# Altium PCB PCB_proj_module_1_1.PcbDoc (part 5 of 9)
Units mm, origin at the board's own origin, x right, y up, seen from the top; angles counter-clockwise.
Board outline 413 x 280 mm, 4 copper layers (Top Layer, Signal Layer 1, Signal Layer 2, Bottom Layer), stack 0.778 mm thick; 1054 components, 639 nets, 3181 pads, 673 vias.
Unrouted connection lines stored in the file: 570.
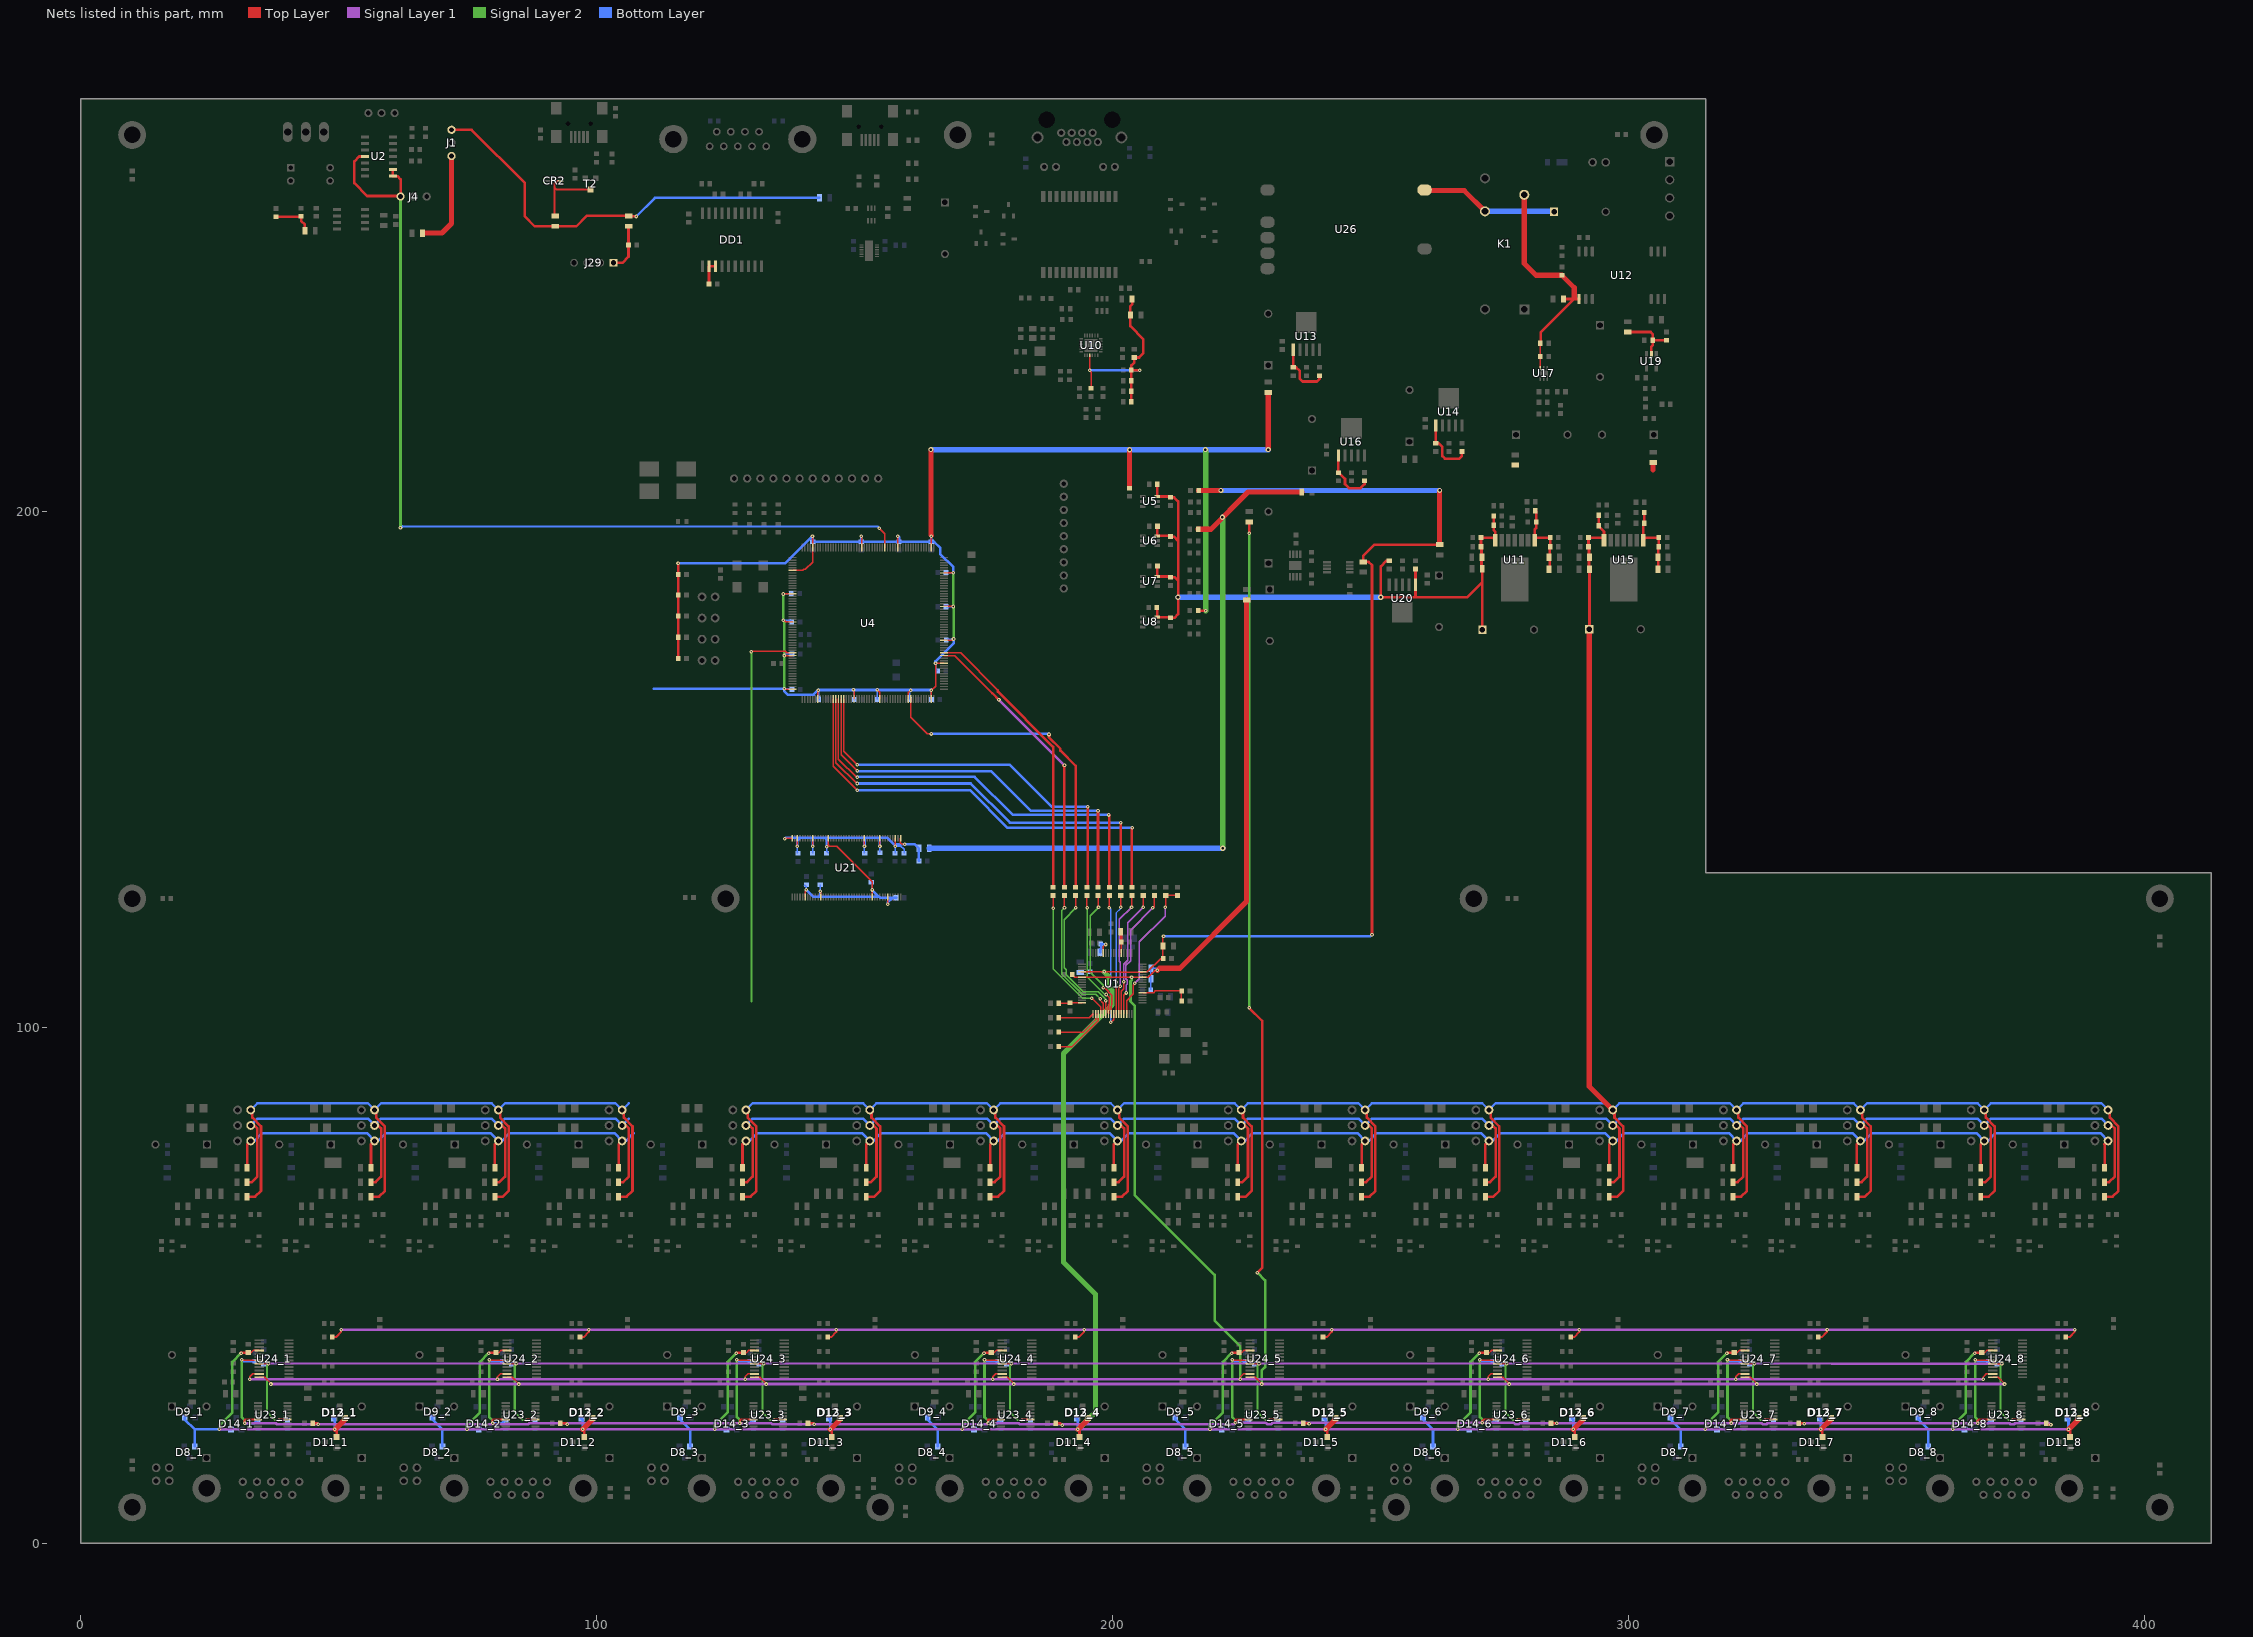
[diagram p6: the nets of this part, all layers, seen from the top]

## Via types
v1: diameter 0.7, hole 0.3, Top Layer to Bottom Layer, tented both sides, 659 vias
v2: diameter 1, hole 0.5, Top Layer to Bottom Layer, tented both sides, 12 vias
v3: diameter 0.66, hole 0.33, Top Layer to Bottom Layer, 2 vias

## Nets (pads, with @x,y where several pads share a name; then routed paths per layer and width w, separated by ;. In a path a pad name is that pad's centre, name@x,y a point inside that pad or via, vN(x,y) a via of type N, cw(c..) or ccw(c..) an arc to the next point about the centre after c; other vN are vias at no path point) (continued)
"3V3 Digital MCU": C27.2 C28.2 C29.2 C30.2 C31.2 C32.2 C33.2 C34.2 C37.2 C38.2 C39.2 C40.2 C41.2 C42.2 C43.2 C44.2 C48.2 J1.1 L7.2 L17.2 L18.2 L?.2 R29.2 R30.2 R41.2 R44.2 R47.2 R49.2 R50.2 U4.6 U4.15 U4.26 U4.39 U4.52 U4.59 U4.73 U4.83 U4.94 U4.103 U4.115 U4.124 U4.137 U4.150 U4.158 U4.171 U4.185 U4.204 | length 459.4
  Top Layer w0.254: v1@136.3,184.106 U4.15@137.986,184.106 ; v1(136.35,165.625) 136.369,165.606 U4.52@137.986,165.606 ; v1(136.4,172.1) v1@136.397,172.1 ; v1@136.475,178.85 136.719,178.606 U4.26@137.986,178.606 ; U4.39@137.986,172.106 137.98,172.1 U4.39@137.975,172.1 v1@136.397,172.1 ; U4.6@137.986,188.606 139.949,188.606 140.12,188.777 140.477,188.777 141.911,190.211 v1@141.911,195.164 ; U4.59@142.9,163.675 142.9,165.3 v1(142.95,165.35) ; v1(149.8,165.45) 149.822,165.45 149.911,165.361 U4.73@149.911,163.681 ; U4.185@151.411,193.031 v1@151.411,195.062 ; v1(154.418,165.454) 154.407,165.454 154.911,164.95 U4.83@154.911,163.681 ; U4.171@158.411,193.031 v1@158.411,195.174 ; U4.94@160.411,163.681 160.411,164.892 160.875,165.356 v1(160.875,165.375) ; U4.103@164.911,163.681 v1(164.911,165.375) 165.706,166.17 v1(165.706,170.602) 167.332,170.602 U4.115@167.336,170.606 ; U4.158@164.911,193.031 v1@164.911,195.024 ; U4.124@167.336,175.106 v1@169.175,175.106 ; U4.137@167.336,181.606 v1@169.175,181.606 ; U4.150@167.336,188.106 v1@169.175,188.106 ; v1@136.397,172.1 136.322,172.175 136.247,172.1 v1@136.397,172.1
  Top Layer w0.5: J1.1@71.9,273.991 75.809,273.991 86.1,263.7 86.1,257.2 88,255.3 L18.2@92,255.3 96.1,255.3 98.1,257.3 L17.2@106.2,257.3 106.3,257.2 v1(107.7,257.2) ; v1(115.8,189.95) 115.85,189.9 R29.2@115.85,187.775 R41.2@115.85,183.84 R44.2@115.85,179.736 R47.2@115.85,175.631 R50.2@115.85,171.526 ; R49.2@216.612,180.822 216.646,180.788 v1(218.086,180.788)
  Top Layer w1: v2(164.8,212) 164.8,195.487 v1@164.956,195.331 ; R30.2@203.311,204.7 v2(203.311,211.989) ; v2(230.2,212) L7.2@230.2,223.1
  Signal Layer 2 w0.254: v1(169.15,181.6) v1@169.175,181.575
  Signal Layer 2 w0.5: v1(136.2,184.025) v1(136.2,178.925) 136.4,178.725 v1(136.4,172.1) 136.4,165.675 v1(136.35,165.625) ; v1(169.15,181.6) v1(169.15,188.125) ; v1@169.175,181.575 169.2,181.55 v1(169.2,175.3)
  Signal Layer 2 w1: v2(218,212) 218.086,211.914 v1(218.086,180.788)
  Bottom Layer w0.254: v1(136.2,178.925) 137.525,178.925 C33.2@137.85,178.6 ; v1(136.2,184.025) 137.675,184.025 C34.2@137.775,184.125 ; v1(136.35,165.625) 137.775,165.625 C31.2@137.875,165.525 ; v1(136.4,172.1) 136.4,172.225 136.575,172.4 C32.2@137.9,172.4 ; v1@149.95,165.415 149.95,163.65 C29.2@150.075,163.525 ; v1(154.418,165.454) 154.418,165.415 154.418,163.632 C28.2@154.45,163.6 ; C27.2@160.7,163.6 160.7,165.2 v1(160.875,165.375) ; v1(164.911,165.375) 164.911,163.614 C44.2@164.925,163.6 ; v1(165.706,170.602) 165.706,169.494 C43.2@166.075,169.125 ; C42.2@167.739,174.952 168.087,175.3 v1(169.2,175.3) ; C48.2@167.739,181.556 167.783,181.6 v1(169.15,181.6) ; C41.2@167.739,188.16 167.774,188.125 v1(169.15,188.125)
  Bottom Layer w0.5: v1(107.7,257.2) 111.3,260.8 L?.2@143.2,260.8 ; 111.1,165.625 v1(136.35,165.625) 136.35,165.2 137.025,164.525 142.059,164.525 v1@142.917,165.383 ; v1(115.8,189.95) 136.55,189.95 v1(141.85,195.25) 141.9,195.2 C37.2@141.9,194.15 C38.2@151.3,194.15 ; v1(142.95,165.35) 142.95,163.75 C30.2@143.075,163.625 ; v1@143.027,165.415 v1@149.8,165.415 ; v1@149.95,165.415 154.418,165.415 164.871,165.415 v1(164.911,165.375) ; v1(151.3,195.2) C38.2@151.3,194.15 ; v1(158.4,195.225) 158.625,195 C39.2@158.625,194.15 ; v1(164.85,195.225) 164.875,195.2 C40.2@164.875,194.15 ; v1(165.706,170.602) 165.706,170.981 169.2,174.475 v1(169.2,175.3) ; v1(169.15,188.125) 169.15,189.225 166.65,191.725 166.65,192.95 165.45,194.15 C40.2@164.875,194.15 ; v1@217.936,180.788 v1(218.086,180.788) ; C38.2@151.3,194.15 C39.2@158.625,194.15 ; C39.2@158.625,194.15 C40.2@164.875,194.15
  Bottom Layer w1: v2(164.8,212) 164.811,211.989 v2(203.311,211.989) 230.189,211.989 v2(230.2,212)
"3V3 Digital SDRAM": L10.2 L16.1 R40.2 | length 144.1
  Top Layer w1: R40.2@216.612,196.57 219.07,196.57 226.294,203.794 L10.2@236.693,203.794
  Signal Layer 2 w1: v2(221.3,198.9) 221.366,198.834 v2(221.366,134.734)
  Bottom Layer w1: L16.1@164.49,134.734 v2(221.366,134.734)
"3V3 Ethernet": C76.2 L4.1 L5.1 R57.2 R58.2 R59.2 R69.2 R70.1 U10.9 | length 40.3
  Top Layer w0.254: v1@195.619,227.424 U10.9@195.619,230.324 ; v1@195.624,227.323 195.905,227.041 C76.2@195.905,224.036
  Top Layer w0.508: R59.2@203.657,221.3 R58.2@203.657,223.332 R57.2@203.657,225.364 R69.2@203.657,227.424 ; L4.1@203.75,241.15 L4.1@203.8,241.2 203.8,240.162 203.45,239.812 203.45,235.95 206,233.4 206,230.7 205.172,229.872 R70.1@204.223,229.872 204.223,228.923 203.657,228.357 R69.2@203.657,227.424 ; v1(205.263,227.424) R69.2@203.657,227.424
  Bottom Layer w0.508: v1(195.611,227.424) v1(205.263,227.424)
"3V3 SDRAM": C133.2 C134.2 C135.2 C136.2 C137.2 C138.2 C139.2 C140.2 C141.2 C142.2 C143.2 C144.1 L16.2 U21.1 U21.3 U21.9 U21.15 U21.29 U21.35 U21.41 U21.43 U21.49 U21.55 U21.75 U21.81 | length 107.2
  Top Layer w0.254: v1(136.514,136.609) 136.582,136.677 137.768,136.677 U21.43@137.866,136.579 ; v1(138.934,135.144) U21.41@138.934,136.678 ; U21.49@140.434,125.278 140.434,126.439 v1(140.678,126.683) ; v1(141.934,135.146) U21.35@141.934,136.678 ; v1(143.378,126.433) 143.434,126.377 U21.55@143.434,125.278 ; U21.29@144.934,136.678 144.934,135.352 145.186,135.1 146.6,135.1 153.434,128.266 v1(153.434,126.66) U21.75@153.434,125.278 ; v1(151.934,135.098) U21.15@151.934,136.678 ; v1(154.934,135.146) U21.9@154.934,136.678 ; v1(156.434,123.866) U21.81@156.434,125.278 ; v1(157.934,135.144) U21.3@157.934,136.678 ; U21.1@158.934,136.678 158.911,136.655 158.911,135.851 159.254,135.508 159.704,135.508 v1(159.754,135.558)
  Top Layer w0.5: v1(144.624,135.042) 144.934,135.352
  Bottom Layer w0.254: v1(136.514,136.609) v1@136.657,136.752 ; v1(138.934,135.144) 138.934,133.874 C139.2@139.036,133.772 ; C141.2@140.306,127.638 140.678,127.266 v1(140.678,126.683) ; 141.718,136.752 141.934,136.536 ; C138.2@141.83,133.81 141.934,133.914 v1(141.934,135.146) ; C142.2@143.354,127.638 143.378,127.614 v1(143.378,126.433) ; v1(144.624,135.042) 144.624,134.176 144.934,133.866 C137.2@144.878,133.81 ; 151.878,136.752 151.934,136.696 ; v1(151.934,135.098) 151.934,133.866 C136.2@151.99,133.81 ; C143.2@153.26,128.4 153.434,128.226 v1(153.434,126.66) ; 154.772,125.322 154.958,125.136 ; 154.926,136.752 154.934,136.744 ; C135.2@154.929,133.949 154.929,135.141 v1(154.934,135.146) ; v1(156.434,123.866) 156.434,124.246 ; C134.2@157.832,133.81 157.934,133.912 v1(157.934,135.144) 158.868,135.144 158.784,135.228 158.916,135.228 159.61,134.534 C133.2@159.61,133.81
  Bottom Layer w0.5: v1@136.657,136.752 136.846,136.752 136.894,136.8 137.556,136.8 137.604,136.752 139.432,136.752 ; v1(138.934,135.144) 138.934,136.254 139.432,136.752 ; v1(140.678,126.683) 142.039,125.322 142.988,125.322 ; v1(141.934,135.146) 141.934,136.536 ; v1(143.378,126.433) 143.378,125.712 142.988,125.322 ; v1(144.624,135.042) 144.624,136.386 144.258,136.752 ; v1(151.934,135.098) 151.934,136.696 ; v1(153.434,126.66) 154.772,125.322 142.988,125.322 ; v1(154.934,135.146) 154.934,136.744 ; 154.958,125.136 157.324,125.136 ; 156.434,124.246 157.324,125.136 ; C144.1@158.048,125.136 157.324,125.136 ; C140.2@162.5,132.3 162.49,132.31 L16.2@162.49,134.734 161.666,135.558 v1(159.754,135.558) 157.667,135.558 157.617,135.508 156.373,136.752 154.926,136.752 151.878,136.752 144.258,136.752 ; 139.432,136.752 141.718,136.752 144.258,136.752
"3V3 ST-link": C145.2 J29.1 L17.1 | length 9.3
  Top Layer w0.508: J29.1@103.277,248.211 105.011,248.211 106.2,249.4 C145.2@106.2,251.7 L17.1@106.2,255.3
"3V3 USB protection": CR2.5 L18.1 T2.3 | length 14.8
  Top Layer w0.381: L18.1@92,257.3 91.9,257.4 91.9,262.8 ; CR2.5@93.013,264.1 92.393,264.1 91.9,263.607 91.9,262.8 ; T2.3@98.833,262.414 92.286,262.414 91.9,262.8
3V9: L22.2 U24_1.12 U24_2.12 U24_3.12 U24_4.12 U24_5.12 U24_6.12 U24_7.12 U24_8.12 | length 528.4
  Top Layer w0.3: U24_1.12@34.63,32.225 35.675,32.225 36.9,31 v1(36.9,30.9) ; U24_2.12@82.63,32.225 83.675,32.225 84.9,31 v1(84.9,30.9) ; U24_3.12@130.63,32.225 131.675,32.225 132.9,31 v1(132.9,30.9) ; U24_4.12@178.63,32.225 179.675,32.225 180.9,31 v1(180.9,30.9) ; U24_5.12@226.63,32.225 227.675,32.225 228.9,31 v1(228.9,30.9) ; U24_6.12@274.63,32.225 275.675,32.225 276.9,31 v1(276.9,30.9) ; U24_7.12@322.63,32.225 323.675,32.225 324.9,31 v1(324.9,30.9) ; U24_8.12@370.63,32.225 371.675,32.225 372.9,31 v1(372.9,30.9)
  Top Layer w0.5: v1(226.5,103.814) 229,101.314 229,53.4 v1(228.1,52.5) ; v1(226.5,195.8) L22.2@226.5,198
  Signal Layer 1 w0.5: v1(36.9,30.9) v1(84.9,30.9) v1(132.9,30.9) v1(180.9,30.9) v1(228.9,30.9) v1(276.9,30.9) v1(324.9,30.9) v1(372.9,30.9)
  Signal Layer 2 w0.5: v1(226.5,103.814) v1(226.5,195.8) ; v1(228.1,52.5) 229.6,51 229.6,34.2 228.9,33.5 v1(228.9,30.9)
3V_pwr: C107.1 C110.2 C111.2 C112.2 C113.2 J24_1.1 J24_2.1 J24_3.1 J24_4.1 J24_5.1 J24_6.1 J24_7.1 J24_8.1 J24_9.1 J24_10.1 J24_11.1 J24_12.1 J24_13.1 J24_14.1 J24_15.1 J24_16.1 L21_1.2 L21_2.2 L21_3.2 L21_4.2 L21_5.2 L21_6.2 L21_7.2 L21_8.2 L21_9.2 L21_10.2 L21_11.2 L21_12.2 L21_13.2 L21_14.2 L21_15.2 L21_16.2 R95.1 TP17.1 U15.7 | length 789.8
  Top Layer w0.5: L21_1.2@32.288,67.226 33.842,67.226 34.97,68.354 34.97,80.858 33.3,82.528 33.3,83.501 33.394,83.596 J24_1.1@32.97,84.02 ; L21_2.2@56.288,67.226 57.842,67.226 58.97,68.354 58.97,80.858 57.3,82.528 57.3,83.501 57.394,83.596 J24_2.1@56.97,84.02 ; L21_3.2@80.288,67.226 81.842,67.226 82.97,68.354 82.97,80.858 81.3,82.528 81.3,83.501 81.394,83.596 J24_3.1@80.97,84.02 ; L21_4.2@104.288,67.226 105.842,67.226 106.97,68.354 106.97,80.858 105.3,82.528 105.3,83.501 105.394,83.596 J24_4.1@104.97,84.02 ; L21_5.2@128.288,67.226 129.842,67.226 130.97,68.354 130.97,80.858 129.3,82.528 129.3,83.501 129.394,83.596 J24_5.1@128.97,84.02 ; L21_6.2@152.288,67.226 153.842,67.226 154.97,68.354 154.97,80.858 153.3,82.528 153.3,83.501 153.394,83.596 J24_6.1@152.97,84.02 ; L21_7.2@176.288,67.226 177.842,67.226 178.97,68.354 178.97,80.858 177.3,82.528 177.3,83.501 177.394,83.596 J24_7.1@176.97,84.02 ; L21_8.2@200.288,67.226 201.842,67.226 202.97,68.354 202.97,80.858 201.3,82.528 201.3,83.501 201.394,83.596 J24_8.1@200.97,84.02 ; L21_9.2@224.288,67.226 225.842,67.226 226.97,68.354 226.97,80.858 225.3,82.528 225.3,83.501 225.394,83.596 J24_9.1@224.97,84.02 ; L21_10.2@248.288,67.226 249.842,67.226 250.97,68.354 250.97,80.858 249.3,82.528 249.3,83.501 249.394,83.596 J24_10.1@248.97,84.02 ; L21_11.2@272.288,67.226 273.842,67.226 274.97,68.354 274.97,80.858 273.3,82.528 273.3,83.501 273.394,83.596 J24_11.1@272.97,84.02 ; L21_12.2@296.288,67.226 297.842,67.226 298.97,68.354 298.97,80.858 297.3,82.528 297.3,83.501 297.394,83.596 J24_12.1@296.97,84.02 ; L21_13.2@320.288,67.226 321.842,67.226 322.97,68.354 322.97,80.858 321.3,82.528 321.3,83.501 321.394,83.596 J24_13.1@320.97,84.02 ; L21_14.2@344.288,67.226 345.842,67.226 346.97,68.354 346.97,80.858 345.3,82.528 345.3,83.501 345.394,83.596 J24_14.1@344.97,84.02 ; L21_15.2@368.288,67.226 369.842,67.226 370.97,68.354 370.97,80.858 369.3,82.528 369.3,83.501 369.394,83.596 J24_15.1@368.97,84.02 ; L21_16.2@392.288,67.226 393.842,67.226 394.97,68.354 394.97,80.858 393.3,82.528 393.3,83.501 393.394,83.596 J24_16.1@392.97,84.02
  Top Layer w0.508: C111.2@292.362,188.86 292.362,193.078 C113.2@292.262,193.178 C112.2@292.262,194.956 294.769,194.956 U15.7@295.272,194.454 295.272,196.12 294.218,197.174 C107.1@294.218,197.242 R95.1@294.218,199.274 ; TP17.1@292.462,177.2 C111.2@292.462,188.86
  Top Layer w1: TP17.1@292.4,177.2 292.4,88.59 J24_12.1@296.97,84.02
  Bottom Layer w0.5: J24_1.1@32.97,84.02 34.27,85.32 55.67,85.32 J24_2.1@56.97,84.02 58.27,85.32 79.67,85.32 J24_3.1@80.97,84.02 82.27,85.32 103.67,85.32 J24_4.1@104.97,84.02 106.27,85.32 ; J24_5.1@128.97,84.02 130.27,85.32 151.67,85.32 J24_6.1@152.97,84.02 154.27,85.32 175.67,85.32 J24_7.1@176.97,84.02 178.27,85.32 199.67,85.32 J24_8.1@200.97,84.02 202.27,85.32 223.67,85.32 J24_9.1@224.97,84.02 226.27,85.32 247.67,85.32 J24_10.1@248.97,84.02 250.27,85.32 271.67,85.32 J24_11.1@272.97,84.02 274.27,85.32 295.67,85.32 J24_12.1@296.97,84.02 298.27,85.32 319.67,85.32 J24_13.1@320.97,84.02 322.27,85.32 343.67,85.32 J24_14.1@344.97,84.02 346.27,85.32 367.67,85.32 J24_15.1@368.97,84.02 370.27,85.32 391.67,85.32 J24_16.1@392.97,84.02
4V096ref: C15.1 C16.2 C19.1 C20.2 L12.2 U1.6 U1.43 U24_1.11 U24_2.11 U24_3.11 U24_4.11 U24_5.11 U24_6.11 U24_7.11 U24_8.11 | length 547.8
  Top Layer w0.254: C19.1@192.2,110.3 192.726,109.774 U1.6@194.098,109.774 v1(203.7,109.774) 205.792,109.774 205.825,109.807 U1.43@205.858,109.774 206.954,109.774 208.255,111.075 v1(208.7,111.075)
  Top Layer w0.3: v1(32.8,31.8) 32.8,32.3 33.375,32.875 U24_1.11@34.63,32.875 ; v1(80.8,31.8) 80.8,32.3 81.375,32.875 U24_2.11@82.63,32.875 ; v1(128.8,31.8) 128.8,32.3 129.375,32.875 U24_3.11@130.63,32.875 ; v1(176.8,31.8) 176.8,32.3 177.375,32.875 U24_4.11@178.63,32.875 ; v1(224.8,31.8) 224.8,32.3 225.375,32.875 U24_5.11@226.63,32.875 ; v1(272.8,31.8) 272.8,32.3 273.375,32.875 U24_6.11@274.63,32.875 ; v1(320.8,31.8) 320.8,32.3 321.375,32.875 U24_7.11@322.63,32.875 ; v1(368.8,31.8) 368.8,32.3 369.375,32.875 U24_8.11@370.63,32.875
  Top Layer w1: v1(208.7,111.075) 209.125,111.5 213.1,111.5 226,124.4 L12.2@226,182.9
  Signal Layer 1 w0.5: v1(32.8,31.8) v1(80.8,31.8) v1(128.8,31.8) v1(176.8,31.8) v1(224.8,31.8) v1(272.8,31.8) v1(320.8,31.8) v1(368.8,31.8)
  Signal Layer 2 w0.5: v1(203.7,109.774) 203.7,109.131 203.5,108.931 203.5,105.044 204.35,104.194 204.35,67.481 219.8,52.031 219.8,43.2 224.8,38.2 v1(224.8,31.8)
  Bottom Layer w0.254: C20.2@207.425,107.3 207.433,107.308 C16.2@207.433,109.436 C15.1@207.433,111.468 208.582,111.468 208.7,111.35 v1(208.7,111.075)
5V8: C49.2 C52.2 C54.2 C56.2 C66.2 C84.1 C89.2 C90.2 C91.2 C92.2 C95.1 C104.1 C116.1 C131.1 DD1.2 DD1.3 J1.3 J22_1.1 J22_2.1 J22_3.1 J22_4.1 J22_5.1 J22_6.1 J22_7.1 J22_8.1 J22_9.1 J22_10.1 J22_11.1 J22_12.1 J22_13.1 J22_14.1 J22_15.1 J22_16.1 L1.2 L20_1.2 L20_2.2 L20_3.2 L20_4.2 L20_5.2 L20_6.2 L20_7.2 L20_8.2 L20_9.2 L20_10.2 L20_11.2 L20_12.2 L20_13.2 L20_14.2 L20_15.2 L20_16.2 R31.1 R39.1 R43.1 R48.1 R77.1 R85.1 R90.1 R98.1 R108.1 TP16.1 U5.6 U6.6 U7.6 U8.6 U11.7 U13.1 U14.1 U16.1 U20.1 | length 648.7
  Top Layer w0.5: L20_1.2@32.288,72.814 32.288,77.338 ; L20_2.2@56.288,72.814 56.288,77.338 ; L20_3.2@80.288,72.814 80.288,77.338 ; L20_4.2@104.288,72.814 104.288,77.338 ; L20_5.2@128.288,72.814 128.288,77.338 ; L20_6.2@152.288,72.814 152.288,77.338 ; L20_7.2@176.288,72.814 176.288,77.338 ; L20_8.2@200.288,72.814 200.288,77.338 ; L20_9.2@224.288,72.814 224.288,77.338 ; L20_10.2@248.288,72.814 248.288,77.338 ; L20_11.2@272.288,72.814 272.288,77.338 ; L20_12.2@296.288,72.814 296.288,77.338 ; L20_13.2@320.288,72.814 320.288,77.338 ; L20_14.2@344.288,72.814 344.288,77.338 ; L20_15.2@368.288,72.814 368.288,77.338 ; L20_16.2@392.288,72.814 392.288,77.338
  Top Layer w0.508: 32.288,77.338 J22_1.1@32.97,78.02 ; 56.288,77.338 J22_2.1@56.97,78.02 ; 80.288,77.338 J22_3.1@80.97,78.02 ; 104.288,77.338 J22_4.1@104.97,78.02 ; C66.2@121.888,244.169 121.801,244.256 DD1.2@121.801,247.531 DD1.3@123.071,247.531 ; 128.288,77.338 J22_5.1@128.97,78.02 ; 152.288,77.338 J22_6.1@152.97,78.02 ; 176.288,77.338 J22_7.1@176.97,78.02 ; 200.288,77.338 J22_8.1@200.97,78.02 ; C56.2@208.608,181.396 cw(c208.386,181.174) 208.7,181.174 U8.6@208.7,179.552 210.748,179.552 cw(c210.748,179.04) R48.1@211.11,179.402 ; C49.2@208.608,205.018 208.7,204.926 U5.6@208.7,202.92 210.96,202.92 211.11,202.77 R31.1@211.236,202.77 211.929,202.77 212.716,201.983 212.716,194.333 ; C54.2@208.7,189.387 U7.6@208.7,187.426 210.96,187.426 211.11,187.276 R43.1@211.236,187.276 212.048,187.276 212.716,186.608 ; C52.2@208.732,197.144 208.7,197.112 U6.6@208.7,195.3 210.96,195.3 211.11,195.15 211.899,195.15 212.716,194.333 ; R48.1@211.236,179.402 212.002,179.402 212.736,180.136 212.736,186.588 212.716,186.608 ; 224.288,77.338 J22_9.1@224.97,78.02 ; U13.1@235.053,231.354 C95.1@235.053,227.948 235.617,227.948 236.323,227.242 236.323,225.718 236.831,225.21 239.625,225.21 240.133,225.718 R85.1@240.133,226.348 ; U16.1@243.789,210.85 C116.1@243.789,207.548 243.857,207.548 245.059,206.346 245.059,205.318 245.821,204.556 248.107,204.556 248.869,205.318 R98.1@248.869,205.986 ; 248.288,77.338 J22_10.1@248.97,78.02 ; R108.1@253.656,190.464 253.064,190.464 252,189.4 v2(252,183.4) 258.7,183.4 ; C131.1@258.736,188.864 U20.1@258.736,185.816 258.736,183.436 258.7,183.4 ; U14.1@262.667,216.654 262.667,213.264 C104.1@262.651,213.248 263.231,213.248 263.937,212.542 263.937,210.764 264.445,210.256 267.239,210.256 267.731,210.748 R90.1@267.731,211.648 ; C92.2@271.538,189.368 271.538,193.078 C90.2@271.438,193.178 C89.2@271.438,194.956 273.691,194.956 U11.7@274.194,194.454 274.194,196.074 273.868,196.4 C84.1@273.868,197.344 R77.1@273.868,199.122 ; TP16.1@271.672,177.1 271.672,186.272 ; C92.2@271.672,188.928 271.672,186.272 ; 272.288,77.338 J22_11.1@272.97,78.02 ; 296.288,77.338 J22_12.1@296.97,78.02 ; 320.288,77.338 J22_13.1@320.97,78.02 ; 344.288,77.338 J22_14.1@344.97,78.02 ; 368.288,77.338 J22_15.1@368.97,78.02 ; 392.288,77.338 J22_16.1@392.97,78.02 ; 212.716,186.608 212.716,194.333 ; 258.7,183.4 268.8,183.4 271.672,186.272
  Top Layer w1: L1.2@66.25,253.966 70.05,253.966 71.9,255.816 J1.3@71.9,268.911
  Bottom Layer w0.508: J22_1.1@32.97,78.02 33.68,78.02 35.18,79.52 55.47,79.52 J22_2.1@56.97,78.02 57.68,78.02 59.18,79.52 79.47,79.52 J22_3.1@80.97,78.02 81.68,78.02 83.18,79.52 103.47,79.52 J22_4.1@104.97,78.02 105.68,78.02 107.18,79.52 ; J22_5.1@128.97,78.02 129.68,78.02 131.18,79.52 151.47,79.52 J22_6.1@152.97,78.02 153.68,78.02 155.18,79.52 175.47,79.52 J22_7.1@176.97,78.02 177.68,78.02 179.18,79.52 199.47,79.52 J22_8.1@200.97,78.02 201.68,78.02 203.18,79.52 223.47,79.52 J22_9.1@224.97,78.02 225.68,78.02 227.18,79.52 247.47,79.52 J22_10.1@248.97,78.02 249.68,78.02 251.18,79.52 271.47,79.52 J22_11.1@272.97,78.02 273.68,78.02 275.18,79.52 295.47,79.52 J22_12.1@296.97,78.02 297.68,78.02 299.18,79.52 319.47,79.52 J22_13.1@320.97,78.02 321.68,78.02 323.18,79.52 343.47,79.52 J22_14.1@344.97,78.02 345.68,78.02 347.18,79.52 367.47,79.52 J22_15.1@368.97,78.02 369.68,78.02 371.18,79.52 391.47,79.52 J22_16.1@392.97,78.02
  Bottom Layer w1: v2(212.7,183.4) v2(252,183.4)
12Vin: C85.2 C86.2 C87.2 C88.2 C96.2 C108.2 C109.2 C114.2 C115.2 C122.2 J21_1.1 J21_2.1 J21_3.1 J21_4.1 J21_5.1 J21_6.1 J21_7.1 J21_8.1 J21_9.1 J21_10.1 J21_11.1 J21_12.1 J21_13.1 J21_14.1 J21_15.1 J21_16.1 K1.2 L19_1.2 L19_2.2 L19_3.2 L19_4.2 L19_5.2 L19_6.2 L19_7.2 L19_8.2 L19_9.2 L19_10.2 L19_11.2 L19_12.2 L19_13.2 L19_14.2 L19_15.2 L19_16.2 R75.2 R76.1 R80.2 R93.2 R94.1 R101.1 U11.1 U12.1 U15.1 U17.6 | length 641.6
  Top Layer w0.254: R101.1@282.935,230.078 R101.1@282.943,230.07
  Top Layer w0.3: R101.1@282.935,230.078 C122.2@282.935,232.634 ; U17.6@282.943,227.842 R101.1@282.943,230.07
  Top Layer w0.5: L19_1.2@32.288,70.02 33.18,70.02 34.27,71.11 34.27,80.43 J21_1.1@33.68,81.02 ; L19_2.2@56.288,70.02 57.18,70.02 58.27,71.11 58.27,80.43 J21_2.1@57.68,81.02 ; L19_3.2@80.288,70.02 81.18,70.02 82.27,71.11 82.27,80.43 J21_3.1@81.68,81.02 ; L19_4.2@104.288,70.02 105.18,70.02 106.27,71.11 106.27,80.43 J21_4.1@105.68,81.02 ; L19_5.2@128.288,70.02 129.18,70.02 130.27,71.11 130.27,80.43 J21_5.1@129.68,81.02 ; L19_6.2@152.288,70.02 153.18,70.02 154.27,71.11 154.27,80.43 J21_6.1@153.68,81.02 ; L19_7.2@176.288,70.02 177.18,70.02 178.27,71.11 178.27,80.43 J21_7.1@177.68,81.02 ; L19_8.2@200.288,70.02 201.18,70.02 202.27,71.11 202.27,80.43 J21_8.1@201.68,81.02 ; L19_9.2@224.288,70.02 225.18,70.02 226.27,71.11 226.27,80.43 J21_9.1@225.68,81.02 ; L19_10.2@248.288,70.02 249.18,70.02 250.27,71.11 250.27,80.43 J21_10.1@249.68,81.02 ; L19_11.2@272.288,70.02 273.18,70.02 274.27,71.11 274.27,80.43 J21_11.1@273.68,81.02 ; C122.2@282.935,232.634 283,232.699 283,234.7 289.5,241.2 ; C96.2@287.6,241.2 289.5,241.2 ; U12.1@290.46,241.2 289.5,241.2 ; L19_12.2@296.288,70.02 297.18,70.02 298.27,71.11 298.27,80.43 J21_12.1@297.68,81.02 ; L19_13.2@320.288,70.02 321.18,70.02 322.27,71.11 322.27,80.43 J21_13.1@321.68,81.02 ; L19_14.2@344.288,70.02 345.18,70.02 346.27,71.11 346.27,80.43 J21_14.1@345.68,81.02 ; L19_15.2@368.288,70.02 369.18,70.02 370.27,71.11 370.27,80.43 J21_15.1@369.68,81.02 ; L19_16.2@392.288,70.02 393.18,70.02 394.27,71.11 394.27,80.43 J21_16.1@393.68,81.02
  Top Layer w0.508: J21_1.1@32.97,81.02 J21_1.1@33.68,81.02 ; J21_2.1@56.97,81.02 J21_2.1@57.68,81.02 ; J21_3.1@80.97,81.02 J21_3.1@81.68,81.02 ; J21_4.1@104.97,81.02 J21_4.1@105.68,81.02 ; J21_5.1@128.97,81.02 J21_5.1@129.68,81.02 ; J21_6.1@152.97,81.02 J21_6.1@153.68,81.02 ; J21_7.1@176.97,81.02 J21_7.1@177.68,81.02 ; J21_8.1@200.97,81.02 J21_8.1@201.68,81.02 ; J21_9.1@224.97,81.02 J21_9.1@225.68,81.02 ; J21_10.1@248.97,81.02 J21_10.1@249.68,81.02 ; J21_11.1@272.97,81.02 J21_11.1@273.68,81.02 ; R76.1@281.975,200.15 282.106,200.019 R75.2@282.106,198.004 282.106,196.772 281.814,196.48 U11.1@281.814,194.454 282.317,194.956 C88.2@284.824,194.956 C87.2@284.824,193.178 284.724,193.078 C85.2@284.724,188.86 ; J21_12.1@296.97,81.02 J21_12.1@297.68,81.02 ; R94.1@303.075,199.8 303.068,199.793 R93.2@303.068,197.75 302.892,197.574 U15.1@302.892,194.454 303.395,194.956 C109.2@305.902,194.956 C108.2@305.902,193.178 305.802,193.078 C115.2@305.802,188.86 ; J21_13.1@320.97,81.02 J21_13.1@321.68,81.02 ; J21_14.1@344.97,81.02 J21_14.1@345.68,81.02 ; J21_15.1@368.97,81.02 J21_15.1@369.68,81.02 ; J21_16.1@392.97,81.02 J21_16.1@393.68,81.02
  Top Layer w1: K1.2@279.82,261.4 279.82,248.08 282.1,245.8 R80.2@287.1,245.8 289.5,243.4 289.5,241.4
  Bottom Layer w0.508: J21_1.1@32.97,81.02 34.274,82.324 55.666,82.324 J21_2.1@56.97,81.02 58.274,82.324 79.666,82.324 J21_3.1@80.97,81.02 82.274,82.324 103.666,82.324 J21_4.1@104.97,81.02 106.274,82.324 ; J21_5.1@128.97,81.02 130.274,82.324 151.666,82.324 J21_6.1@152.97,81.02 154.274,82.324 175.666,82.324 J21_7.1@176.97,81.02 178.274,82.324 199.666,82.324 J21_8.1@200.97,81.02 202.274,82.324 223.666,82.324 J21_9.1@224.97,81.02 226.274,82.324 247.666,82.324 J21_10.1@248.97,81.02 250.274,82.324 271.666,82.324 J21_11.1@272.97,81.02 274.274,82.324 295.666,82.324 J21_12.1@296.97,81.02 298.274,82.324 319.666,82.324 J21_13.1@320.97,81.02 322.274,82.324 343.666,82.324 J21_14.1@344.97,81.02 346.274,82.324 367.666,82.324 J21_15.1@368.97,81.02 370.274,82.324 391.666,82.324 J21_16.1@392.97,81.02
"12Vin PoE": K1.4 TP1.1 U26.7 | length 25.9
  Top Layer w1: U26.7@261.431,262.2 268.2,262.2 K1.4@272.2,258.2
  Bottom Layer w1: K1.4@272.2,258.2 285.5,258.2 TP1.1@285.6,258.1
"+5V PGA, AD7768, ref": C1.1 C2.2 C3.2 C7.1 C8.2 C9.2 C13.1 C17.1 C153_1.2 C153_2.2 C153_3.2 C153_4.2 C153_5.2 C153_6.2 C153_7.2 C153_8.2 D8_1.2 D8_2.2 D8_3.2 D8_4.2 D8_5.2 D8_6.2 D8_7.2 D8_8.2 D9_1.2 D9_2.2 D9_3.2 D9_4.2 D9_5.2 D9_6.2 D9_7.2 D9_8.2 D11_1.2 D11_2.2 D11_3.2 D11_4.2 D11_5.2 D11_6.2 D11_7.2 D11_8.2 D12_1.2 D12_2.2 D12_3.2 D12_4.2 D12_5.2 D12_6.2 D12_7.2 D12_8.2 D13_1.2 D13_2.2 D13_3.2 D13_4.2 D13_5.2 D13_6.2 D13_7.2 D13_8.2 D14_1.2 D14_2.2 D14_3.2 D14_4.2 D14_5.2 D14_6.2 D14_7.2 D14_8.2 L11.1 L15.2 R33.2 U1.4 U1.45 U1.53 U1.60 U24_1.4 U24_2.4 U24_3.4 U24_4.4 U24_5.4 U24_6.4 U24_7.4 U24_8.4 | length 997.3
  Top Layer w0.254: 201.6,110.741 205.825,110.741 U1.45@205.858,110.774 206.735,110.774 209.311,113.35 209.73,113.35 209.73,117.53 v1(209.9,117.7)
  Top Layer w0.3: C153_1.2@32.5,37 33.1,37 33.525,37.425 U24_1.4@34.63,37.425 ; C153_2.2@80.5,37 81.1,37 81.525,37.425 U24_2.4@82.63,37.425 ; C153_3.2@128.5,37 129.1,37 129.525,37.425 U24_3.4@130.63,37.425 ; C153_4.2@176.5,37 177.1,37 177.525,37.425 U24_4.4@178.63,37.425 ; U1.4@194.098,110.774 201.567,110.774 201.6,110.741 ; U1.60@198.228,114.404 198.222,114.41 198.222,115.678 198.645,116.1 v1(198.7,116.1) ; C17.1@201.7,116.6 201.728,116.572 U1.53@201.728,114.404 ; C153_5.2@224.5,37 225.1,37 225.525,37.425 U24_5.4@226.63,37.425 ; C153_6.2@272.5,37 273.1,37 273.525,37.425 U24_6.4@274.63,37.425 ; C153_7.2@320.5,37 321.1,37 321.525,37.425 U24_7.4@322.63,37.425 ; C153_8.2@368.5,37 369.1,37 369.525,37.425 U24_8.4@370.63,37.425
  Top Layer w0.5: v1(31.1,36.9) 31.2,37 C153_1.2@32.5,37 ; v1(49.3,22.1) 49.61,21.79 D11_1.2@49.61,20.616 ; v1@79.2,37 C153_2.2@80.5,37 ; v1(97.3,22.1) 97.61,21.79 D11_2.2@97.61,20.616 ; v1@127.2,37 C153_3.2@128.5,37 ; v1(145.3,22.1) 145.61,21.79 D11_3.2@145.61,20.616 ; v1@175.2,37 C153_4.2@176.5,37 ; v1(193.3,22.1) 193.61,21.79 D11_4.2@193.61,20.616 ; C13.1@201.6,118.6 201.7,118.5 C17.1@201.7,116.6 ; v1@223.2,37 C153_5.2@224.5,37 ; v1(241.3,22.1) 241.61,21.79 D11_5.2@241.61,20.616 ; v1(250.3,118) 250.3,189.6 249.649,190.251 L11.1@248.599,190.251 248.599,191.399 250.8,193.6 L15.2@263.4,193.6 ; v1@271.2,37 C153_6.2@272.5,37 ; v1(289.3,22.1) 289.61,21.79 D11_6.2@289.61,20.616 ; v1@319.2,37 C153_7.2@320.5,37 ; v1(337.3,22.1) 337.61,21.79 D11_7.2@337.61,20.616 ; v1@367.2,37 C153_8.2@368.5,37 ; v1(385.3,22.1) 385.61,21.79 D11_8.2@385.61,20.616
  Top Layer w1: v1(49.3,22.1) 51.243,24.043 D13_1.2@51.243,24.317 ; v1(97.3,22.1) 99.243,24.043 D13_2.2@99.243,24.317 ; v1(145.3,22.1) 147.243,24.043 D13_3.2@147.243,24.317 ; v1(193.3,22.1) 195.243,24.043 D13_4.2@195.243,24.317 ; R33.2@216.736,204.063 221.063,204.063 v2(221.026,204.1) ; v1(241.3,22.1) 243.243,24.043 D13_5.2@243.243,24.317 ; L15.2@263.4,193.6 v2(263.4,204.1) ; v1(289.3,22.1) 291.243,24.043 D13_6.2@291.243,24.317 ; v1(337.3,22.1) 339.243,24.043 D13_7.2@339.243,24.317 ; v1(385.3,22.1) 387.243,24.043 D13_8.2@387.243,24.317
  Signal Layer 1 w0.5: v1(26.9,22.1) v1(49.3,22.1) v1(74.9,22.1) v1(97.3,22.1) v1(122.9,22.1) v1(145.3,22.1) v1(170.9,22.1) v1(193.3,22.1) v1(218.9,22.1) v1(241.3,22.1) v1(266.9,22.1) v1(289.3,22.1) v1(314.9,22.1) v1(337.3,22.1) v1(362.9,22.1) v1(385.3,22.1)
  Signal Layer 2 w0.5: v1(26.9,22.1) 26.9,22.9 29.4,25.4 29.4,35.2 v1(31.1,36.9) ; v1(74.9,22.1) 74.9,22.9 77.4,25.4 77.4,35.2 v1(79.1,36.9) ; v1(122.9,22.1) 122.9,22.9 125.4,25.4 125.4,35.2 v1(127.1,36.9) ; v1(170.9,22.1) 170.9,22.9 173.4,25.4 173.4,35.2 v1(175.1,36.9) ; v1(218.9,22.1) 218.9,22.9 221.4,25.4 221.4,35.2 v1(223.1,36.9) ; v1(266.9,22.1) 266.9,22.9 269.4,25.4 269.4,35.2 v1(271.1,36.9) ; v1(314.9,22.1) 314.9,22.9 317.4,25.4 317.4,35.2 v1(319.1,36.9) ; v1(362.9,22.1) 362.9,22.9 365.4,25.4 365.4,35.2 v1(367.1,36.9)
  Signal Layer 2 w1: v1(193.3,22.1) 196.7,25.5 196.7,48.3 190.5,54.5 190.5,94.985 199.9,104.385 199.9,107.3 199.25,107.95 199.25,109.924 v1(198.4,110.774)
  Bottom Layer w0.254: v1@209.73,117.53 v1(209.9,117.7)
  Bottom Layer w0.5: D9_1.2@20.184,24.39 20.184,24.048 22.132,22.1 ; D8_1.2@22.132,18.8 22.132,22.1 ; D14_1.2@29.168,22.1 v1(26.9,22.1) 22.132,22.1 ; D12_1.2@49.084,24.19 49.3,23.974 v1(49.3,22.1) ; D9_2.2@68.184,24.39 68.184,24.048 70.132,22.1 ; D8_2.2@70.132,18.8 70.132,22.1 ; D14_2.2@77.168,22.1 v1(74.9,22.1) 70.132,22.1 ; D12_2.2@97.084,24.19 97.3,23.974 v1(97.3,22.1) ; D9_3.2@116.184,24.39 116.184,24.048 118.132,22.1 ; D8_3.2@118.132,18.8 118.132,22.1 ; D14_3.2@125.168,22.1 v1(122.9,22.1) 118.132,22.1 ; D12_3.2@145.084,24.19 145.3,23.974 v1(145.3,22.1) ; D9_4.2@164.184,24.39 164.184,24.048 166.132,22.1 ; D8_4.2@166.132,18.8 166.132,22.1 ; D14_4.2@173.168,22.1 v1(170.9,22.1) 166.132,22.1 ; D12_4.2@193.084,24.19 193.3,23.974 v1(193.3,22.1) ; C9.2@197.6,114.6 197.6,115.1 197.8,115.3 197.8,116.1 C3.2@197.728,116.172 198.628,116.172 v1(198.7,116.1) ; v1(209.9,117.7) 250,117.7 v1(250.3,118) ; D9_5.2@212.184,24.39 212.184,24.048 214.132,22.1 ; D8_5.2@214.132,18.8 214.132,22.1 ; D14_5.2@221.168,22.1 v1(218.9,22.1) 214.132,22.1 ; D12_5.2@241.084,24.19 241.3,23.974 v1(241.3,22.1) ; D9_6.2@260.184,24.39 260.184,24.048 262.132,22.1 ; D8_6.2@262.132,18.8 262.132,22.1 ; D14_6.2@269.168,22.1 v1(266.9,22.1) 262.132,22.1 ; D12_6.2@289.084,24.19 289.3,23.974 v1(289.3,22.1) ; D9_7.2@308.184,24.39 308.184,24.048 310.132,22.1 ; D8_7.2@310.132,18.8 310.132,22.1 ; D14_7.2@317.168,22.1 v1(314.9,22.1) 310.132,22.1 ; D12_7.2@337.084,24.19 337.3,23.974 v1(337.3,22.1) ; D9_8.2@356.184,24.39 356.184,24.048 358.132,22.1 ; D8_8.2@358.132,18.8 358.132,22.1 ; D14_8.2@365.168,22.1 v1(362.9,22.1) 358.132,22.1 ; D12_8.2@385.084,24.19 385.3,23.974 v1(385.3,22.1)
  Bottom Layer w1: v2(221.026,204.1) v2(263.4,204.1)
+5V_ISO: C26.2 L2.1 R25.2 | length 7.8
  Top Layer w0.5: R25.2@37.9,257.146 42.75,257.146 42.75,256.321 43.475,255.596 L2.1@43.475,254.471
+8V_A: C151_1.1 C151_2.1 C151_3.1 C151_4.1 C151_5.1 C151_6.1 C151_7.1 C151_8.1 C155_1.2 C155_2.2 C155_3.2 C155_4.2 C155_5.2 C155_6.2 C155_7.2 C155_8.2 L13.2 R123_1.2 R123_2.2 R123_3.2 R123_4.2 R123_5.2 R123_6.2 R123_7.2 R123_8.2 U23_1.14 U23_2.14 U23_3.14 U23_4.14 U23_5.14 U23_6.14 U23_7.14 U23_8.14 U24_1.7 U24_2.7 U24_3.7 U24_4.7 U24_5.7 U24_6.7 U24_7.7 U24_8.7 | length 561.1
  Top Layer w0.3: v1(31.2,35.6) 31.325,35.475 U24_1.7@34.63,35.475 ; v1(79.2,35.6) 79.325,35.475 U24_2.7@82.63,35.475 ; v1(127.2,35.6) 127.325,35.475 U24_3.7@130.63,35.475 ; v1(175.2,35.6) 175.325,35.475 U24_4.7@178.63,35.475 ; v1(223.2,35.6) 223.325,35.475 U24_5.7@226.63,35.475 ; v1(271.2,35.6) 271.325,35.475 U24_6.7@274.63,35.475 ; v1(319.2,35.6) 319.325,35.475 U24_7.7@322.63,35.475 ; v1(367.2,35.6) 367.325,35.475 U24_8.7@370.63,35.475
  Top Layer w0.4: v1(31.8,23.3) 31.8,23.9 31.9,24 U23_1.14@34.4,24 ; v1(79.9,23.339) 79.8,23.439 79.8,23.9 79.9,24 U23_2.14@82.4,24 ; v1(127.8,23.3) 127.8,23.9 127.9,24 U23_3.14@130.4,24 ; v1(175.9,23.339) 175.9,23.8 175.8,23.9 175.9,24 U23_4.14@178.4,24 ; v1(223.8,23.382) 223.8,23.9 223.9,24 U23_5.14@226.4,24 ; v1(271.685,23.382) 271.685,23.785 271.9,24 U23_6.14@274.4,24 ; v1(319.9,23.339) 319.8,23.439 319.8,23.9 319.9,24 U23_7.14@322.4,24 ; v1(367.699,23.3) 367.699,23.799 367.9,24 U23_8.14@370.4,24
  Top Layer w0.5: R123_1.2@45,23.3 45.9,23.3 v1(46.1,23.1) ; R123_2.2@93,23.3 94.1,23.3 v1(94.3,23.1) ; R123_3.2@141,23.3 142,23.3 v1(142.2,23.1) ; R123_4.2@189,23.3 189.9,23.3 v1(190.3,22.9) ; R123_5.2@237,23.3 238,23.3 v1(238.1,23.2) ; R123_6.2@285,23.3 v1(286.1,23.3) ; R123_7.2@333,23.3 v1@334.181,23.3 ; R123_8.2@381,23.3 381.3,23 v1(381.9,23)
  Signal Layer 1 w0.5: v1(31.8,23.3) 37.869,23.3 38.069,23.1 v1(46.1,23.1) 79.661,23.1 v1(79.9,23.339) 80.139,23.1 86.731,23.1 86.931,23.3 v1(127.8,23.3) 133.869,23.3 134.069,23.1 v1(142.2,23.1) 175.661,23.1 v1(175.9,23.339) 181.829,23.339 182.069,23.1 223.518,23.1 v1(223.8,23.382) 229.787,23.382 230.069,23.1 230.731,23.1 231.013,23.382 v1@238.1,23.382 ; v1(238.1,23.2) v1@238.1,23.382 ; v1@238.1,23.392 v1@238.1,23.382 ; v1(381.9,23) 381.6,23.3 374.931,23.3 374.731,23.1 374.069,23.1 373.869,23.3 v1(367.699,23.3) 326.931,23.3 326.731,23.1 326.069,23.1 325.829,23.339 v1(319.9,23.339) 278.971,23.339 278.731,23.1 278.069,23.1 277.787,23.382 v1(271.685,23.382) v1@238.1,23.382
  Signal Layer 2 w0.5: v1(31.2,35.6) 31.2,24.5 31.8,23.9 v1(31.8,23.3) ; v1(79.2,35.6) 79.2,24.5 79.9,23.8 v1(79.9,23.339) ; v1(127.2,35.6) 127.2,24.5 127.8,23.9 v1(127.8,23.3) ; v1(175.2,35.6) 175.2,24.5 175.9,23.8 v1(175.9,23.339) ; v1(223.2,35.6) 223.2,24.5 223.8,23.9 v1(223.8,23.382) ; v1(271.2,35.6) 271.2,24.5 271.8,23.9 271.685,23.785 v1(271.685,23.382) ; v1(319.2,35.6) 319.2,24.5 319.9,23.8 v1(319.9,23.339) ; v1(367.2,35.6) 367.2,24.5 367.8,23.9 367.699,23.799 v1(367.699,23.3)
  Bottom Layer w0.5: v1(31.2,35.6) 31.5,35.3 33.7,35.3 C155_1.2@33.8,35.4 ; v1(31.8,23.3) 33.6,23.3 34.3,24 C151_1.1@34.4,23.9 ; v1(79.2,35.6) 79.5,35.3 81.7,35.3 C155_2.2@81.8,35.4 ; v1(79.9,23.339) 81.639,23.339 82.3,24 C151_2.1@82.4,23.9 ; v1(127.2,35.6) 127.5,35.3 129.7,35.3 C155_3.2@129.8,35.4 ; v1(127.8,23.3) 129.6,23.3 130.3,24 C151_3.1@130.4,23.9 ; v1(175.2,35.6) 175.5,35.3 177.7,35.3 C155_4.2@177.8,35.4 ; v1(175.9,23.339) 177.639,23.339 178.3,24 C151_4.1@178.4,23.9 ; v1(223.2,35.6) 223.5,35.3 225.7,35.3 C155_5.2@225.8,35.4 ; v1(223.8,23.382) 225.682,23.382 226.3,24 C151_5.1@226.4,23.9 ; v1(271.2,35.6) 271.5,35.3 273.7,35.3 C155_6.2@273.8,35.4 ; v1(271.685,23.382) 273.682,23.382 274.3,24 C151_6.1@274.4,23.9 ; v1(319.2,35.6) 319.5,35.3 321.7,35.3 C155_7.2@321.8,35.4 ; v1(319.9,23.339) 321.639,23.339 322.3,24 C151_7.1@322.4,23.9 ; v1(367.2,35.6) 367.5,35.3 369.7,35.3 C155_8.2@369.8,35.4 ; v1(367.699,23.3) 369.6,23.3 370.3,24 C151_8.1@370.4,23.9
  other v1: 334.1,23.2
-8V_A: C152_1.2 C152_2.2 C152_3.2 C152_4.2 C152_5.2 C152_6.2 C152_7.2 C152_8.2 C156_1.2 C156_2.2 C156_3.2 C156_4.2 C156_5.2 C156_6.2 C156_7.2 C156_8.2 L14.2 U23_1.3 U23_2.3 U23_3.3 U23_4.3 U23_5.3 U23_6.3 U23_7.3 U23_8.3 U24_1.8 U24_2.8 U24_3.8 U24_4.8 U24_5.8 U24_6.8 U24_7.8 U24_8.8 | length 485.7
  Top Layer w0.3: U24_1.8@34.63,34.825 v1(36.4,34.825) ; U24_2.8@82.63,34.825 v1(84.4,34.825) ; U24_3.8@130.63,34.825 v1(132.4,34.825) ; U24_4.8@178.63,34.825 v1(180.4,34.825) ; U24_5.8@226.63,34.825 v1(228.4,34.825) ; U24_6.8@274.63,34.825 v1(276.4,34.825) ; U24_7.8@322.63,34.825 v1(324.4,34.825) ; U24_8.8@370.63,34.825 v1(372.4,34.825)
  Top Layer w0.4: v1(38.4,23.9) 38.5,24 U23_1.3@40.14,24 ; v1(86.4,23.9) 86.5,24 U23_2.3@88.14,24 ; v1(134.4,23.9) 134.5,24 U23_3.3@136.14,24 ; v1(182.4,23.9) 182.5,24 U23_4.3@184.14,24 ; v1(230.4,23.9) 230.5,24 U23_5.3@232.14,24 ; v1(278.4,23.9) 278.5,24 U23_6.3@280.14,24 ; v1(326.4,23.9) 326.5,24 U23_7.3@328.14,24 ; v1(374.4,23.9) 374.5,24 U23_8.3@376.14,24
  Top Layer w1: 304.8,208.1 L14.2@304.8,209.5
  Signal Layer 1 w0.4: v1(36.4,34.825) 36.425,34.85 51.311,34.85 98.689,34.85 99.311,34.85 146.689,34.85 147.311,34.85 194.689,34.85 195.311,34.85 242.689,34.85 243.311,34.85 290.689,34.85 291.311,34.85 338.689,34.85 339.311,34.85 339.336,34.825 v1(372.4,34.825)
  Signal Layer 2 w0.4: v1(36.4,34.825) 36.15,34.575 36.15,25.45 37.7,23.9 v1(38.4,23.9) ; v1(84.4,34.825) 84.15,34.575 84.15,25.45 85.7,23.9 v1(86.4,23.9) ; v1(132.4,34.825) 132.15,34.575 132.15,25.45 133.7,23.9 v1(134.4,23.9) ; v1(180.4,34.825) 180.15,34.575 180.15,25.45 181.7,23.9 v1(182.4,23.9) ; v1(228.4,34.825) 228.15,34.575 228.15,25.45 229.7,23.9 v1(230.4,23.9) ; v1(276.4,34.825) 276.15,34.575 276.15,25.45 277.7,23.9 v1(278.4,23.9) ; v1(324.4,34.825) 324.15,34.575 324.15,25.45 325.7,23.9 v1(326.4,23.9) ; v1(372.4,34.825) 372.15,34.575 372.15,25.45 373.7,23.9 v1(374.4,23.9)
  Bottom Layer w0.4: v1(38.4,23.9) C152_1.2@40.1,23.9 ; v1(86.4,23.9) C152_2.2@88.1,23.9 ; v1(134.4,23.9) C152_3.2@136.1,23.9 ; v1(182.4,23.9) C152_4.2@184.1,23.9 ; v1(230.4,23.9) C152_5.2@232.1,23.9 ; v1(278.4,23.9) C152_6.2@280.1,23.9 ; v1(326.4,23.9) C152_7.2@328.1,23.9 ; v1(374.4,23.9) C152_8.2@376.1,23.9
  Bottom Layer w0.5: C156_1.2@35.5,34.7 35.6,34.8 v1@36.375,34.8 ; C156_2.2@83.5,34.7 83.6,34.8 v1@84.375,34.8 ; C156_3.2@131.5,34.7 131.6,34.8 v1@132.375,34.8 ; C156_4.2@179.5,34.7 179.6,34.8 v1@180.375,34.8 ; C156_5.2@227.5,34.7 227.6,34.8 v1@228.375,34.8 ; C156_6.2@275.5,34.7 275.6,34.8 v1@276.375,34.8 ; C156_7.2@323.5,34.7 323.6,34.8 v1@324.375,34.8 ; C156_8.2@371.5,34.7 371.6,34.8 v1@372.375,34.8
-12V: C127.2 L24.2 R104.1 U19.2 | length 11.4
  Top Layer w0.5: L24.2@299.9,234.8 304.3,234.8 304.7,234.4 R104.1@304.7,233.2 ; U19.2@304.45,230.522 304.45,231.95 304.7,232.2 R104.1@304.7,233.2 ; C127.2@307.2,233.2 R104.1@304.7,233.2
\CurrOff: J4.1 U2.4 U2.8 U2.9 U4.176 | length 184.4
  Top Layer w0.254: v1(154.8,196.8) 155.9,195.7 U4.176@155.9,193.025
  Top Layer w0.5: U2.4@55.105,268.824 54.008,268.824 53.05,267.866 53.05,263.666 55.55,261.166 62.03,261.166 62.03,264.386 61.402,265.014 U2.8@60.505,265.014 U2.9@60.505,266.284
  Signal Layer 2 w0.5: v1(62,196.9) 62,197.1 62.01,197.11 J4.1@62.01,261.066
  Bottom Layer w0.4: 62.4,197.111 154.489,197.111 v1(154.8,196.8)
  Bottom Layer w0.5: v1(62,196.9) 62.211,197.111 62.4,197.111
AD7768_CS: R9.2 U4.174 | length 128.2
  Top Layer w0.254: U4.174@156.9,193.025 156.9,194.483 156.815,194.568 156.815,197.515 v1(157,197.7)
  Top Layer w0.4: v1(186.6,104.6) 187.9,104.6 R9.2@188,104.7
  Signal Layer 1 w0.4: v1(157,197.7) 185,197.7 v1(185.2,197.5)
  Signal Layer 2 w0.4: v1(185.2,197.5) 185,197.3 185,107.751 186.6,106.151 v1(186.6,104.6)
AD7768_CS: R8.1 R9.1 U1.16 | length 4.6
  Top Layer w0.254: R9.1@189.6,104.7 191.7,104.7 R8.1@191.774,104.774 ; R8.1@191.8,104.8 R8.1@191.774,104.774 ; U1.16@194.098,104.774 R8.1@191.774,104.774
AD7768_D_OUT0: R12.2 U4.65 | length 87.4
  Top Layer w0.254: U4.65@145.9,163.675 145.9,150.6 v1(150.5,146)
  Top Layer w0.5: R12.2@203.773,127.2 203.773,138.573 203.8,138.6 v1(203.8,138.7)
  Bottom Layer w0.5: v1(150.5,146) 172.4,146 179.7,138.7 v1(203.8,138.7)
AD7768_D_OUT1: R13.2 U4.66 | length 85
  Top Layer w0.254: U4.66@146.4,163.675 146.4,151.3 150.5,147.2 v1(150.5,147.3)
  Top Layer w0.5: R13.2@201.591,127.2 201.591,139.691 v1(201.6,139.7)
  Bottom Layer w0.5: v1(150.5,147.3) 172.5,147.3 180.1,139.7 v1(201.6,139.7)
AD7768_D_OUT2: R14.2 U4.67 | length 82.8
  Top Layer w0.254: U4.67@146.9,163.675 146.9,152 150.5,148.4 v1(150.5,148.5)
  Top Layer w0.5: v1(199.3,141.2) 199.409,141.091 R14.2@199.409,127.2
  Bottom Layer w0.5: v1(150.5,148.5) 150.6,148.6 173.3,148.6 180.7,141.2 v1(199.3,141.2)
AD7768_D_OUT3: R15.2 U4.68 | length 79.9
  Top Layer w0.254: U4.68@147.4,163.675 147.4,152.9 150.5,149.8 v1(150.5,149.75)
  Top Layer w0.5: v1(197.2,142) 197.2,127.227 R15.2@197.227,127.2
  Bottom Layer w0.5: v1(150.5,149.75) 150.55,149.7 176.5,149.7 184.2,142 v1(197.2,142)
AD7768_D_OUT4: R16.2 U4.69 | length 77.6
  Top Layer w0.254: U4.69@147.9,163.675 147.9,153.5 v1(150.5,150.9)
  Top Layer w0.5: R16.2@195.045,127.2 195.2,127.355 v1(195.2,142.8)
  Bottom Layer w0.5: v1(150.5,150.9) 180.1,150.9 188.2,142.8 v1(195.2,142.8)
AD7768_D_OUT5: R17.2 U4.95 | length 63.5
  Top Layer w0.254: U4.95@160.9,163.675 160.9,160.1 164.1,156.9 v1(164.9,156.9)
  Top Layer w0.5: v1(187.7,156.8) 187.7,156.23 189.9,154.03 189.9,153.698 192.864,150.734 R17.2@192.864,127.2
  Bottom Layer w0.3: v1(164.9,156.9) v1@164.95,156.9
  Bottom Layer w0.5: v1@164.95,156.9 187.6,156.9 v1(187.7,156.8)
AD7768_D_OUT6: R19.2 U4.118 | length 56
  Top Layer w0.254: U4.118@167.325,172.1 169.4,172.1 176.7,164.8
  Top Layer w0.5: 176.7,164.8 v1(178,163.5) ; R19.2@190.682,127.2 190.682,150.518 190.5,150.7 190.6,150.8 v1(190.7,150.8)
  Signal Layer 1 w0.5: v1(178,163.5) v1(190.7,150.8)
AD7768_D_OUT7: R20.2 U4.119 | length 56.1
  Top Layer w0.254: U4.119@167.325,172.6 170.6,172.6 177.8,165.4
  Top Layer w0.5: 177.8,165.4 177.8,165.1 188.5,154.4 R20.2@188.5,127.2
AD7768_DCLK: R21.2 U4.121 | length 71.3
  Top Layer w0.254: U4.121@167.325,173.6 167.358,173.633 178.151,173.633 178.261,173.523 180.539,173.523 180.893,173.877 181.68,173.877 182.6,172.957 ; 182.6,163.031 182.85,162.781
  Top Layer w0.5: 182.6,163.031 182.6,172.957 ; 182.85,162.781 188.5,157.131 188.5,156.42 190.6,154.32 190.6,153.988 205.955,138.634 R21.2@205.955,127.2
AD7768_DCLK: R21.1 U1.28 | length 24.8
  Top Layer w0.254: U1.28@201.728,102.644 201.728,107.028 202.2,107.5 v1(202.2,108.9) ; R21.1@205.955,125.6 205.955,123.345 v1(206,123.3)
  Signal Layer 1 w0.254: v1(202.2,108.9) 202.146,108.954 202.146,112.245 202.977,113.076 202.977,120.277 v1(206,123.3)
AD7768_DOUT0: R12.1 U1.27 | length 24.1
  Top Layer w0.254: U1.27@201.228,102.644 201.228,107.728 v1(201.5,108) ; v1(203.7,123.3) 203.773,123.373 R12.1@203.773,125.6
  Signal Layer 1 w0.254: v1(201.5,108) 201.5,112.644 201.346,112.799 201.346,120.946 v1(203.7,123.3)
AD7768_DOUT1: R13.1 U1.26 | length 23.3
  Top Layer w0.3: v1(200.7,108.8) 200.728,108.772 U1.26@200.728,102.644 ; v1(201.591,123.309) R13.1@201.591,125.6
  Bottom Layer w0.3: v1(200.7,108.8) 200.7,122.2 201.591,123.091 v1(201.591,123.309)
AD7768_DOUT2: R14.1 U1.25 | length 26.6
  Top Layer w0.3: v1(199.4,123.2) 199.409,123.209 R14.1@199.409,125.6 ; v1(199.7,101) 200.228,101.528 U1.25@200.228,102.644
  Bottom Layer w0.3: v1(199.4,123.2) 199.7,122.9 v1(199.7,101)
AD7768_DOUT3: R15.1 U1.24 | length 25.6
  Top Layer w0.254: R15.1@197.227,125.6 197.227,123.373 v1(197.3,123.3) ; v1(198.2,107.7) 198.457,107.7 199.877,106.28 199.877,104.402 199.728,104.253 U1.24@199.728,102.644
  Signal Layer 2 w0.254: v1(197.3,123.3) 195.673,121.673 195.673,110.684 198.2,108.157 v1(198.2,107.7)
AD7768_DOUT4: R16.1 U1.23 | length 25
  Top Layer w0.3: R16.1@195.045,125.6 195.045,123.255 v1(195.1,123.2) ; v1(198.8,106.4) 199.4,105.799 199.4,104.6 199.228,104.428 U1.23@199.228,102.644
  Signal Layer 2 w0.3: v1(195.1,123.2) 195.1,109.81 198.51,106.4 v1(198.8,106.4)
AD7768_DOUT5: R17.1 U1.22 | length 29
  Top Layer w0.254: R17.1@192.864,125.6 192.864,123.236 v1(192.9,123.2) ; v1(198.7,105.2) 198.728,105.172 U1.22@198.728,102.644
  Signal Layer 2 w0.254: v1(192.9,123.2) 190.623,120.923 190.623,111.577 191.023,111.177 191.023,110.22 194.32,106.923 197.235,106.923 198.7,105.457 v1(198.7,105.2)
AD7768_DOUT6: R19.1 U1.21 | length 28.1
  Top Layer w0.3: R19.1@190.682,125.6 190.682,123.218 v1(190.7,123.2) ; v1(197.6,105.6) 197.6,105.31 198.228,104.682 U1.21@198.228,102.644
  Signal Layer 2 w0.3: v1(190.7,123.2) 190.146,122.646 190.146,110.422 194.122,106.446 196.754,106.446 v1(197.6,105.6)
AD7768_DOUT7: R20.1 U1.20 | length 27.9
  Top Layer w0.3: v1(188.5,123.1) R20.1@188.5,125.6 ; v1(196,105.7) 197.728,103.971 U1.20@197.728,102.644
  Signal Layer 2 w0.3: v1(188.5,123.1) 188.5,111.361 194.161,105.7 v1(196,105.7)
AD7768_DR: R22.2 U4.120 | length 73.9
  Top Layer w0.254: U4.120@167.325,173.1 167.356,173.069 181.269,173.069 v1(181.4,173.2)
  Top Layer w0.5: v1(186,173.2) 186,160.621 189.2,157.421 189.2,156.71 191.3,154.61 191.3,154.278 208.136,137.442 R22.2@208.136,127.2
  Bottom Layer w0.5: v1(181.4,173.2) v1(186,173.2)
AD7768_DR: R22.1 U1.29 | length 25.8
  Top Layer w0.254: U1.29@202.228,102.644 202.228,106.228 v1(202.7,106.7) ; v1(207.8,123.2) 207.9,123.2 208.136,123.436 R22.1@208.136,125.6
  Signal Layer 1 w0.254: v1(202.7,106.7) 202.6,106.7 202.7,106.8 202.7,108.243 202.877,108.42 202.877,109.18 202.6,109.457 202.6,112.057 203.5,112.957 203.5,118.9 v1(207.8,123.2)
AD7768_MOSI: R5.1 U1.18 | length 9.2
  Top Layer w0.3: R5.1@189.6,99.1 194.293,99.1 196.728,101.535 U1.18@196.728,102.644
AD7768_RESET: R24.2 U4.122 | length 77.6
  Top Layer w0.254: U4.122@167.325,174.1 178.5,174.1
  Top Layer w0.5: 178.5,174.1 178.6,174.2 180.4,174.2 180.7,174.5 186.7,174.5 191.5,169.7 191.5,155.4 192,154.9 192,154.568 212.6,133.968 R24.2@212.6,127.2
AD7768_RESET: R23.1 R24.1 U1.30 | length 28.5
  Top Layer w0.254: U1.30@202.728,102.644 202.728,105.228 204,106.5 204,108.2 204.3,108.5 v1(204.3,108.6) ; v1(210.2,123.3) 210.2,123.2 210.318,123.318 R23.1@210.318,125.6 R24.1@212.6,125.6
  Signal Layer 1 w0.254: v1(204.3,108.6) 205.177,109.477 205.177,116.577 210.2,121.6 v1@210.2,123.2
AD7768_SCLK: R6.1 U1.17 | length 6.9
  Top Layer w0.254: R6.1@189.6,101.9 195.484,101.9 U1.17@196.228,102.644
AD7768_SDO: R4.1 U1.19 | length 11
  Top Layer w0.3: R4.1@189.6,96.3 192.2,96.3 197.228,101.328 U1.19@197.228,102.644
AD7768_START: R11.2 U4.123 | length 118.5
  Top Layer w0.254: U4.123@167.325,174.6 169.457,174.6 169.857,175 v1(179.9,175)
  Top Layer w0.5: R11.2@215.018,107.063 v1(216.637,107.063)
  Signal Layer 2 w0.5: v1(216.1,174.6) 216.1,107.6 v1(216.637,107.063)
  Bottom Layer w0.5: v1(179.9,175) 215.7,175 v1(216.1,174.6)
AD7768_START: R10.1 R11.1 U1.37 | length 8.9
  Top Layer w0.254: U1.37@205.858,106.774 208.018,106.774 208.325,107.081 R11.1@213.286,107.081 ; R10.1@213.336,105.605 R11.1@213.336,106.956
ADA4254_CS: R125_1.1 R125_2.1 R125_3.1 R125_4.1 R125_5.1 R125_6.1 R125_7.1 R125_8.1 U4.38 | length 432
  Top Layer w0.254: v1(130,172.8) 130.1,172.9 136.6,172.9 136.9,172.6 U4.38@137.975,172.6
  Top Layer w0.4: R125_1.1@48.8,40 49.5,40 50.5,41 v1(50.5,41.4) ; R125_2.1@96.8,40 97.5,40 98.5,41 v1(98.5,41.4) ; R125_3.1@144.8,40 145.5,40 146.5,41 v1(146.5,41.4) ; R125_4.1@192.8,40 193.5,40 194.5,41 v1(194.5,41.4) ; R125_5.1@240.8,40 241.5,40 242.5,41 v1(242.5,41.4) ; R125_6.1@288.8,40 289.5,40 290.5,41 v1(290.5,41.4) ; R125_7.1@336.8,40 337.5,40 338.5,41 v1(338.5,41.4) ; R125_8.1@384.8,40 385.5,40 386.5,41 v1(386.5,41.4)
  Signal Layer 1 w0.5: v1(50.5,41.4) v1(98.5,41.4) v1(146.5,41.4) v1(194.5,41.4) v1(242.5,41.4) v1(290.5,41.4) v1(338.5,41.4) v1(386.5,41.4)
  Signal Layer 2 w0.4: 130,105.058 v1(130,172.8)